# Altium PCB IFP.PcbDoc
Units mm, origin at the board's own origin, x right, y up, seen from the top; angles counter-clockwise.
Board outline 94 x 72 mm, 2 copper layers (Top Layer, Bottom Layer); 13 components, 31 nets, 208 pads, 6 vias.
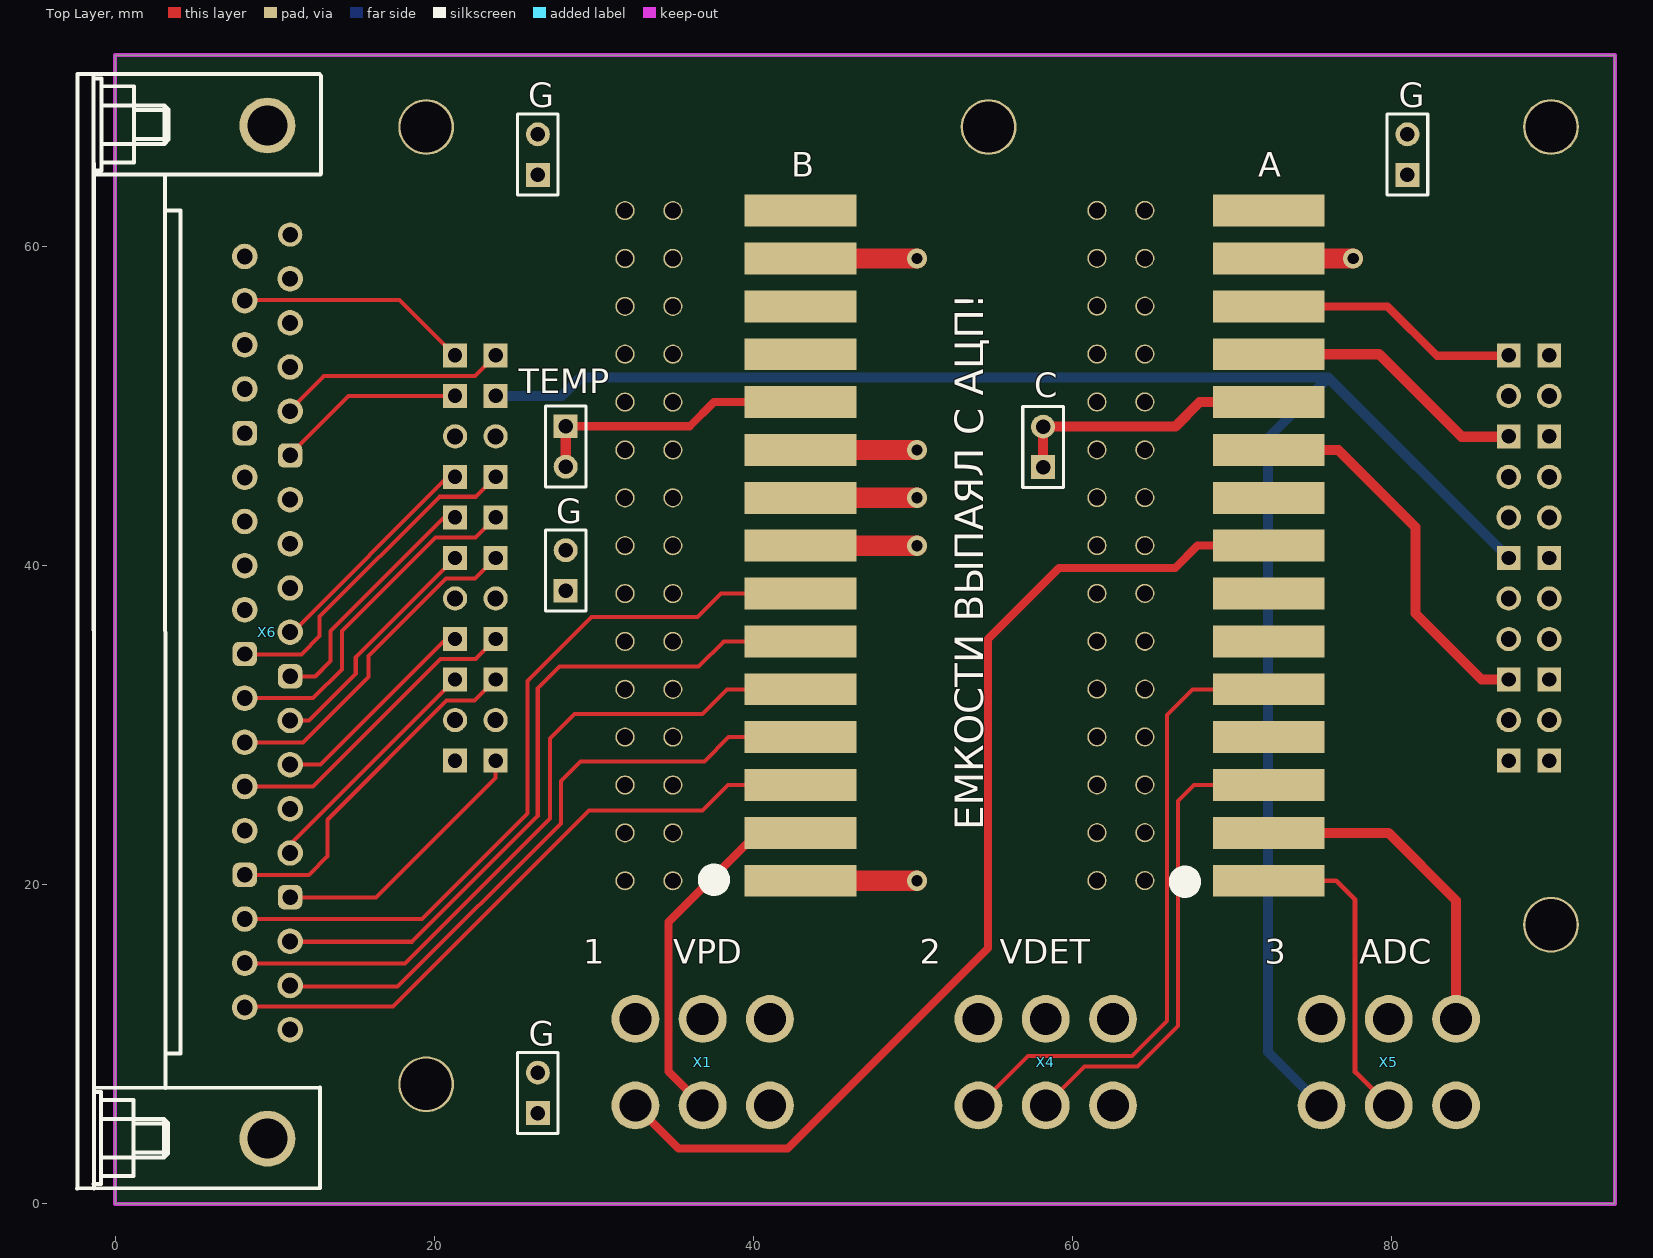
[diagram p0: Top Layer view]
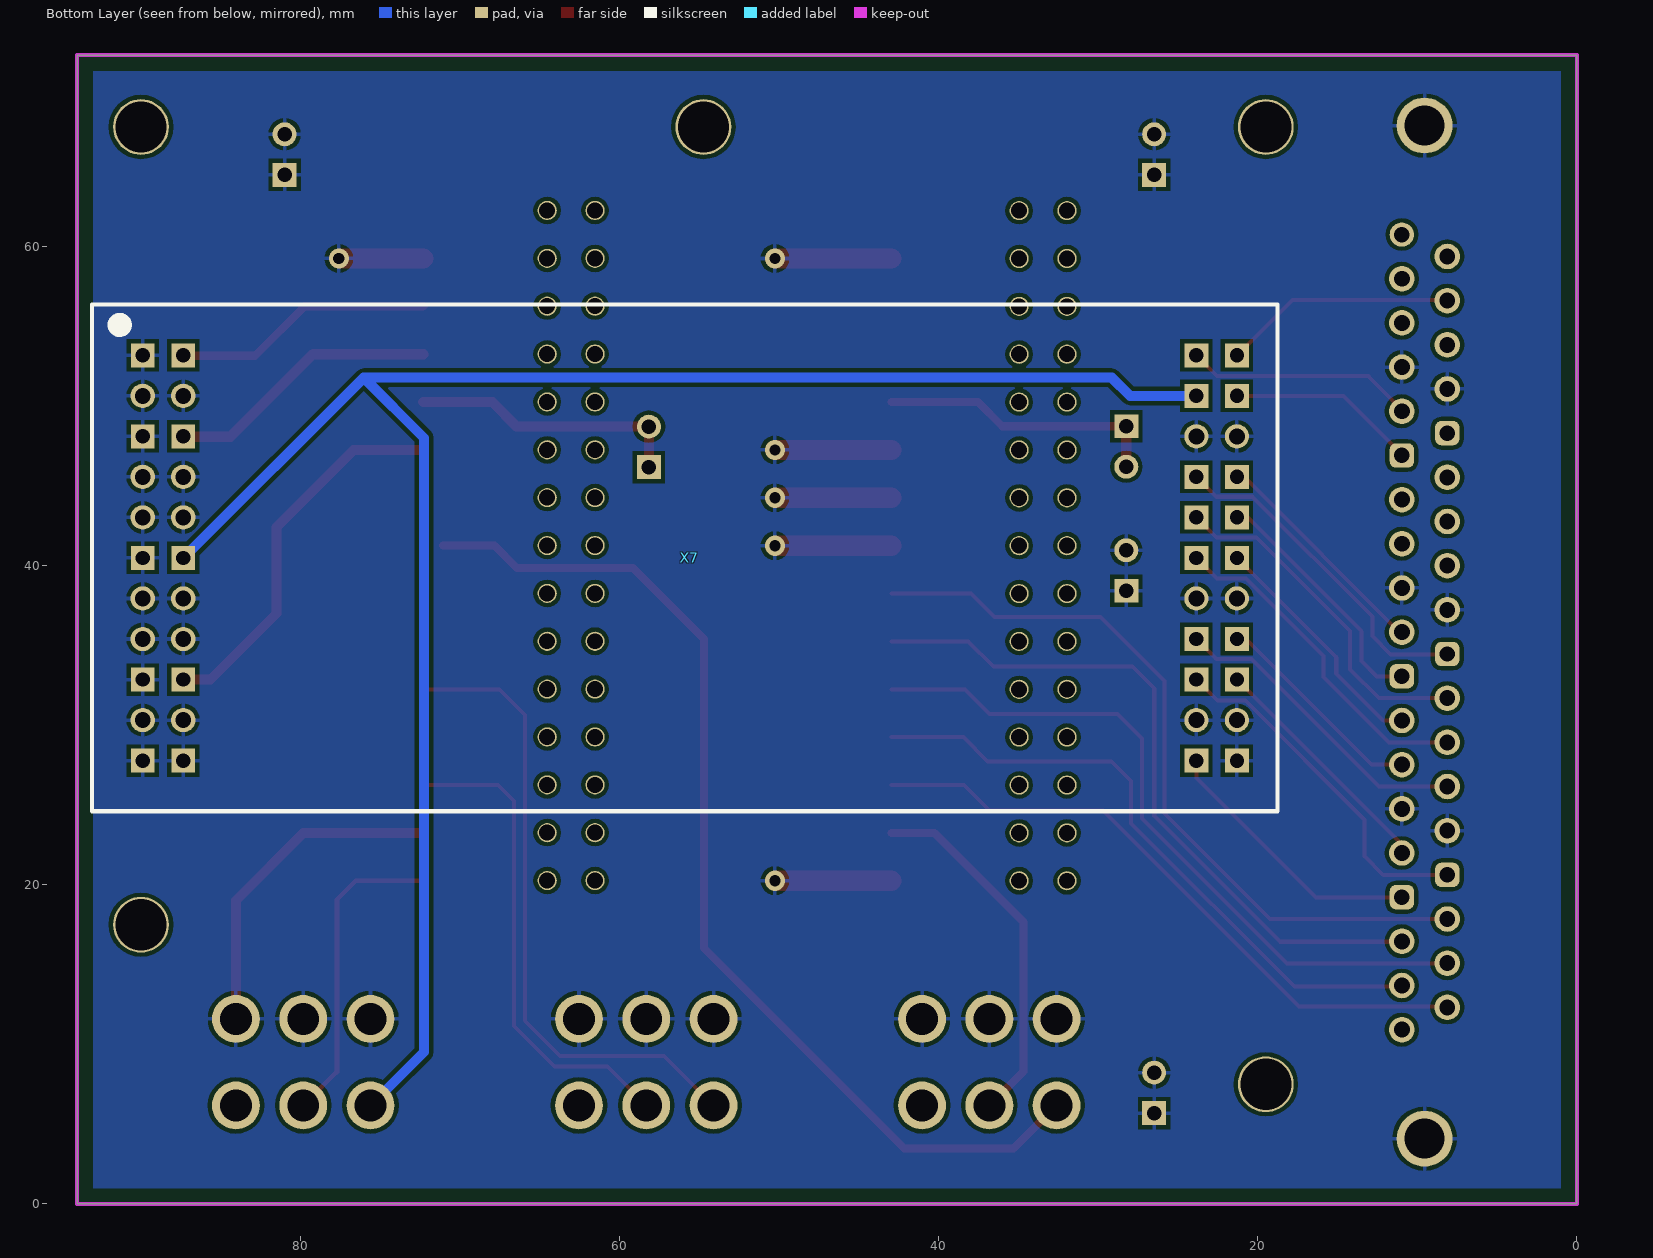
[diagram p1: Bottom Layer view, seen from below]

## Layer stack, top to bottom
Top Solder: solder mask 0.0102, Solder Resist, Dk 3.5
Top Layer: signal copper 0.0356
Dielectric 1: dielectric 0.32, FR-4, Dk 4.8
Bottom Layer: signal copper 0.0356
Bottom Solder: solder mask 0.0102, Solder Resist, Dk 3.5

## Board outline
0,0 94,0 94,72 0,72

## Design rules (kind name [scope] priority, off if disabled: settings)
Clearance [All] p1: gap=0.254
PolygonConnect [All] p1: connectstyle=Relief reliefconductorwidth=0.254 reliefentries=4 polygonreliefangle="90 Angle" airgapwidth=0.254
RoutingVias [All] p1: holewidth=0.711 width=1.27 viastyle="Through Hole" minholewidth=0.711 minwidth=1.27 maxholewidth=0.711 maxwidth=1.27
SolderMaskExpansion [All] p1: expansion=0.102
Width [All] p1: maxlimit=2.254 minlimit=0.254 preferedwidth=0.254
29 further rules are at their usual default settings.

## Classes and differential pairs
component class Sheet: A B C G TEMP X1 X4 X5 X6 X7

## Components (designator, comment, footprint, x,y, rotation, side; value= is the part's Value field where it differs from the comment)
A "SIDE_A" INCAM_CONNECTOR_FPGA_15_QUADRO 72.312,20.256 r90 top (schematic designator X2)
B "SIDE_B" INCAM_CONNECTOR_FPGA_15_QUADRO 42.962,20.256 r90 top (schematic designator X3)
C "Header 2" HDR1X2 58.166,46.177 r90 top (schematic designator P6)
G "Header 2" HDR1X2 26.5,5.69 r90 top (schematic designator P4)
G "Header 2" HDR1X2 26.5,64.5 r90 top (schematic designator P3)
G "Header 2" HDR1X2 81,64.5 r90 top (schematic designator P2)
G "Header 2" HDR1X2 28.245,38.43 r90 top (schematic designator P1)
TEMP "Header 2" HDR1X2 28.245,48.743 r270 top (schematic designator P1)
X1 "VPD" POWER 36.83,13.792 r180 top
X4 "VDET" POWER 58.331,13.792 r180 top
X5 "ADC" POWER 79.832,13.792 r180 top
X6 "CHEAP_CON_37_FEMALE" CHEAP_CONN_FEMALE 9.55,4.089 r90 top
X7 "MEZON_ADC" MEZON_ADC 89.891,53.188 r180 bottom

## Footprints (in the part's own frame and the unit in brackets; to place one, negate y for a bottom-side part, rotate by r counter-clockwise, add the part's x,y. Pads: shape width x height; smd on the part's side, far side on the other; paste and mask are expansions set on the pad)
CHEAP_CONN_FEMALE [mm] "CHEAP_CONN_FEMALE"
  round 1.6 hole 1: 1(6.833,-1.422) 2(9.601,-1.422) 3(12.37,-1.422) 5(17.907,-1.422) 6(20.676,-1.422) 7(23.444,-1.422) 8(26.213,-1.422) 10(31.75,-1.422) 11(34.519,-1.422) 12(37.287,-1.422) 13(40.056,-1.422) 15(45.593,-1.422) 16(48.362,-1.422) 17(51.13,-1.422) 18(53.899,-1.422) 20(8.23,1.422) 21(10.998,1.422) 22(13.767,1.422) 24(19.304,1.422) 25(22.073,1.422) 26(24.841,1.422) 27(27.61,1.422) 29(33.147,1.422) 30(35.916,1.422) 31(38.684,1.422) 32(41.453,1.422) 34(46.99,1.422) 35(49.759,1.422) 36(52.527,1.422) 37(55.296,1.422)
  rrect50% 1.524x1.524 hole 0.965: 4(15.138,-1.422) 9(28.981,-1.422) 14(42.824,-1.422) 23(16.535,1.422) 28(30.378,1.422) 33(44.221,1.422)
  round 1.524 hole 0.965: 19(56.667,-1.422)
  round 3.5 hole 2.5: 38(0,0) 39(63.5,0)
  silkscreen extent -3.11,-3.36 66.72,11.92
HDR1X2 [mm] "Connector; Header; 2 Position"
  rect 1.5x1.5 hole 0.9: 1(0,0)
  round 1.5 hole 0.9: 2(2.54,0)
  silkscreen extent -1.27,-1.27 3.81,1.27
INCAM_CONNECTOR_FPGA_15_QUADRO [mm]
  rect 2x7 smd: 1(0,0) 2(3,0) 3(6,0) 4(9,0) 5(12,0) 6(15,0) 7(18,0) 8(21,0) 9(24,0) 10(27,0) 11(30,0) 12(33,0) 13(36,0) 14(39,0) 15(42,0)
MEZON_ADC [mm] "MEZON_ADC"
  rect 1.5x1.5 hole 0.9: 1(0,0) 2(2.54,0) 5(0,-5.08) 6(2.54,-5.08) 11(0,-12.7) 12(2.54,-12.7) 17(0,-20.32) 18(2.54,-20.32) 21(0,-25.4) 22(2.54,-25.4) 23(66.04,-25.4) 24(68.58,-25.4) 27(66.04,-20.32) 28(68.58,-20.32) 29(66.04,-17.78) 30(68.58,-17.78) 33(66.04,-12.7) 34(68.58,-12.7) 35(66.04,-10.16) 36(68.58,-10.16) 37(66.04,-7.62) 38(68.58,-7.62) 41(66.04,-2.54) 42(68.58,-2.54) 43(66.04,0) 44(68.58,0)
  round 1.524 hole 1: 3(0,-2.54) 4(2.54,-2.54) 7(0,-7.62) 8(2.54,-7.62) 9(0,-10.16) 10(2.54,-10.16) 13(0,-15.24) 14(2.54,-15.24) 15(0,-17.78) 16(2.54,-17.78) 19(0,-22.86) 20(2.54,-22.86) 25(66.04,-22.86) 26(68.58,-22.86) 31(66.04,-15.24) 32(68.58,-15.24) 39(66.04,-5.08) 40(68.58,-5.08)
  silkscreen extent -3.18,-28.58 71.12,3.18
POWER [mm] "POWER"
  round 3 hole 2: 1(4.217,7.62) 2(0,7.62) 3(-4.217,7.62) 4(4.217,2.198) 5(0,2.198) 6(-4.217,2.198)

## Part data
A B: library part INCAM_15_QUADRO
C G G G G TEMP: "Header, 2-Pin"
X1 X4 X5: library part POWER

## Free pads (board coordinates)
  round 3.5 hole 3.2 unplated: 0(19.5,7.5) 0(19.5,67.5) 0(54.75,67.5) 0(90,17.5) 0(90,67.5)
  round 1.2 hole 1 unplated: 1(31.962,20.256) 1(31.962,23.256) 1(31.962,26.256) 1(31.962,29.256) 1(31.962,32.256) 1(31.962,35.256) 1(31.962,38.256) 1(31.962,41.256) 1(31.962,44.256) 1(31.962,47.256) 1(31.962,50.256) 1(31.962,53.256) 1(31.962,56.256) 1(31.962,59.256) 1(31.962,62.256) 1(34.962,20.256) 1(34.962,23.256) 1(34.962,26.256) 1(34.962,29.256) 1(34.962,32.256) 1(34.962,35.256) 1(34.962,38.256) 1(34.962,41.256) 1(34.962,44.256) 1(34.962,47.256) 1(34.962,50.256) 1(34.962,53.256) 1(34.962,56.256) 1(34.962,59.256) 1(34.962,62.256) 1(61.541,20.266) 1(61.541,23.266) 1(61.541,26.266) 1(61.541,29.266) 1(61.541,32.266) 1(61.541,35.266) 1(61.541,38.266) 1(61.541,41.266) 1(61.541,44.266) 1(61.541,47.266) 1(61.541,50.266) 1(61.541,53.266) 1(61.541,56.266) 1(61.541,59.266) 1(61.541,62.266) 1(64.541,20.266) 1(64.541,23.266) 1(64.541,26.266) 1(64.541,29.266) 1(64.541,32.266) 1(64.541,35.266) 1(64.541,38.266) 1(64.541,41.266) 1(64.541,44.266) 1(64.541,47.266) 1(64.541,50.266) 1(64.541,53.266) 1(64.541,56.266) 1(64.541,59.266) 1(64.541,62.266)

## Via types
v1: diameter 1.27, hole 0.711, Top Layer to Bottom Layer, 6 vias

## Nets (pads, with @x,y where several pads share a name; then routed paths per layer and width w, separated by ;. In a path a pad name is that pad's centre, name@x,y a point inside that pad or via, vN(x,y) a via of type N, cw(c..) or ccw(c..) an arc to the next point about the centre after c; other vN are vias at no path point)
ADC_POW: X5.1 X7.12 X7.41 | length 117.2
  Bottom Layer w0.635: X7.41 28.016,50.648 29.159,51.791 76.048,51.791 ; X5.1 72.263,9.524 72.263,48.006 76.048,51.791 ; X7.12 76.048,51.791
ADCCLK: X6.23 X7.27 | length 22.1
  Top Layer w0.254: X6.23 12.141,20.625 13.31,21.793 13.31,24.079 20.777,31.547 22.53,31.547 X7.27
CDSCLK1: X6.4 X7.23 | length 17.1
  Top Layer w0.254: X6.4 10.998,19.202 16.358,19.202 23.851,26.695 X7.23
CDSCLK2: X6.5 X7.28 | length 15.2
  Top Layer w0.254: X6.5 10.973,22.53 X7.28
CLK: B.3 X6.20 | length 40.6
  Top Layer w0.254: X6.20 8.179,12.37 17.424,12.37 29.718,24.663 36.83,24.663 38.423,26.256 B.3
D0: X6.7 X7.30 | length 13.6
  Top Layer w0.254: X6.7 12.878,27.534 20.752,35.408 X7.30
D1: X6.25 X7.29 | length 19.6
  Top Layer w0.254: X6.25 12.395,26.162 20.396,34.163 22.606,34.163 X7.29
D2: X6.8 X7.34 | length 15.2
  Top Layer w0.254: X6.8 12.141,30.302 15.088,33.249 15.088,34.265 X7.34
D3: X6.26 X7.33 | length 21.3
  Top Layer w0.254: X6.26 11.786,28.931 15.875,33.02 15.875,34.334 20.734,39.192 22.555,39.192 X7.33
D4: X6.9 X7.36 | length 15.6
  Top Layer w0.254: X6.9 12.548,33.071 13.492,34.015 13.492,35.895 20.625,43.028 X7.36
D5: X6.27 X7.35 | length 21.8
  Top Layer w0.254: X6.27 12.421,31.699 14.224,33.503 14.224,35.908 20.073,41.758 22.581,41.758 X7.35
D6: X6.10 X7.38 | length 14.3
  Top Layer w0.254: X6.10@11.048,35.764 20.851,45.568 X7.38
D7: X6.28 X7.37 | length 21.1
  Top Layer w0.254: X6.28@8.128,34.442 11.684,34.442 12.827,35.585 12.827,36.825 20.325,44.323 22.606,44.323 X7.37
DATA: B.6 X6.3 | length 44.5
  Top Layer w0.254: X6.3 10.998,16.434 18.618,16.434 26.492,24.308 26.492,32.309 27.864,33.68 36.576,33.68 38.152,35.256 B.6
FSYNC: B.5 X6.21 | length 44.9
  Top Layer w0.254: X6.21 8.153,15.062 18.161,15.062 27.254,24.155 27.254,29.159 28.804,30.709 36.805,30.709 38.352,32.256 B.5
GND: A.2 A.14 B.1 B.8 B.9 B.10 B.14 G.1 G.2 X1.4 X1.5 X1.6 X4.4 X4.5 X4.6 X5.4 X5.5 X5.6 X6.6 X6.11 X6.16 X6.24 X6.29 X6.34 X6.38 X6.39 X7.1 X7.3 X7.4 X7.5 X7.7 X7.8 X7.9 X7.10 X7.11 X7.13 X7.14 X7.15 X7.16 X7.17 X7.19 X7.20 X7.21 X7.22 X7.24 X7.25 X7.26 X7.31 X7.32 X7.39 X7.40 | length 63.2
  Top Layer w0.254: B.9 B.9@43.301,43.917
  Top Layer w0.635: A.2 79.817,23.256 84.05,19.024 X5.6
  Top Layer w1.27: B.1 v1(50.267,20.256) ; B.8 v1(50.267,41.256) ; B.9 v1(50.267,44.256) ; B.10 v1(50.267,47.256) ; B.14 v1(50.267,59.256) ; A.14 77.595,59.256 v1(77.597,59.258)
I_ADJ: A.3 X4.2 | length 30.6
  Top Layer w0.254: X4.2 60.77,8.611 64.084,8.611 66.624,11.151 66.624,25.248 67.633,26.256 A.3
LSYNC: B.4 X6.2 | length 40.1
  Top Layer w0.254: X6.2 11.049,13.614 17.704,13.614 27.94,23.851 27.94,26.518 29.159,27.737 36.932,27.737 38.451,29.256 B.4
OUT_A: A.13 X7.2 | length 16.3
  Top Layer w0.508: A.13 79.761,56.256 82.855,53.162 X7.2@87.351,53.162
OUT_B: A.12 X7.6 | length 17.2
  Top Layer w0.635: A.12 79.23,53.256 84.404,48.082 X7.6@87.351,48.082
OUT_C: A.11 C.1 C.2 | length 17.3
  Top Layer w0.635: C.1 C.2 66.446,48.717 67.986,50.256 A.11
OUT_D: A.10 X7.18 | length 24.2
  Top Layer w0.635: A.10 76.67,47.256 81.509,42.418 81.509,37.008 85.649,32.868 X7.18
RESET_B: B.7 X6.22 | length 48.1
  Top Layer w0.254: X6.22 19.228,17.856 25.857,24.486 25.857,32.766 29.87,36.779 36.5,36.779 37.977,38.256 B.7
SCLK: X6.15 X7.43 | length 14.4
  Top Layer w0.254: X6.15@10.922,49.733 13.081,51.892 22.555,51.892 X7.43
SDATA: X6.36 X7.44 | length 14.6
  Top Layer w0.254: X6.36@8.128,56.667 17.831,56.667 X7.44
SLOAD: X6.14 X7.42 | length 11.9
  Top Layer w0.254: X6.14@10.935,46.952 14.63,50.648 X7.42
TEMP: B.11 TEMP.1 TEMP.2 | length 17.9
  Top Layer w0.508: TEMP.1 36.017,48.743 37.531,50.256 B.11
  Top Layer w0.635: TEMP.2 TEMP.1
VDET_ADJ: A.5 X4.1 | length 40.2
  Top Layer w0.254: X4.1 57.212,9.271 63.729,9.271 65.938,11.481 65.938,30.658 67.537,32.256 A.5
VOS: A.8 X1.1 | length 66.6
  Top Layer w0.508: X1.1 35.305,3.48 42.164,3.48 54.712,16.027 54.712,35.408 59.157,39.853 66.446,39.853 67.85,41.256 A.8@71.069,41.256
VPD: B.2 X1.2 | length 23
  Top Layer w0.508: X1.2 34.696,8.306 34.696,17.678 40.274,23.256 B.2
VPOS: A.1 X5.2 | length 19.7
  Top Layer w0.305: A.1 76.543,20.256 77.724,19.075 77.724,8.28 X5.2
pads on no net: A.4 A.6 A.7 A.9 A.15 B.12 B.13 B.15 X1.3 X4.3 X5.3 X6.1 X6.12 X6.13 X6.17 X6.18 X6.19 X6.30 X6.31 X6.32 X6.33 X6.35 X6.37

## Polygon pours and split planes (outlines as drawn)
GND on Bottom Layer "Top Overlay-No Net" (solid, remove dead copper, pour order 3): 1,71 93,71 93,1 92.978,0.978 1,0.978

## Keep-outs
Keep-Out Layer:
  the board outline again, w0.254

## Silkscreen, mask and mechanical layers (free items; w line width, h text height)
Top Overlay:
  circle w1: c37.541,20.32 r0.511
  circle w1: c67.056,20.193 r0.511
  text "ЕМКОСТИ ВЫПАЯЛ С АЦП!" at 55.016,23.419 h3.05 r90
  text "1" at 29.337,15.062 h1.52
  text "2" at 50.444,15.062 h1.52
  text "3" at 72.06,15.062 h1.52